# Altium PCB PCB2.PcbDoc (part 1 of 2)
Units mm, origin at the board's own origin, x right, y up, seen from the top; angles counter-clockwise.
Board outline 105.63 x 88.15 mm, 2 copper layers (Top Layer, Bottom Layer); 104 components, 90 nets, 384 pads, 160 vias.
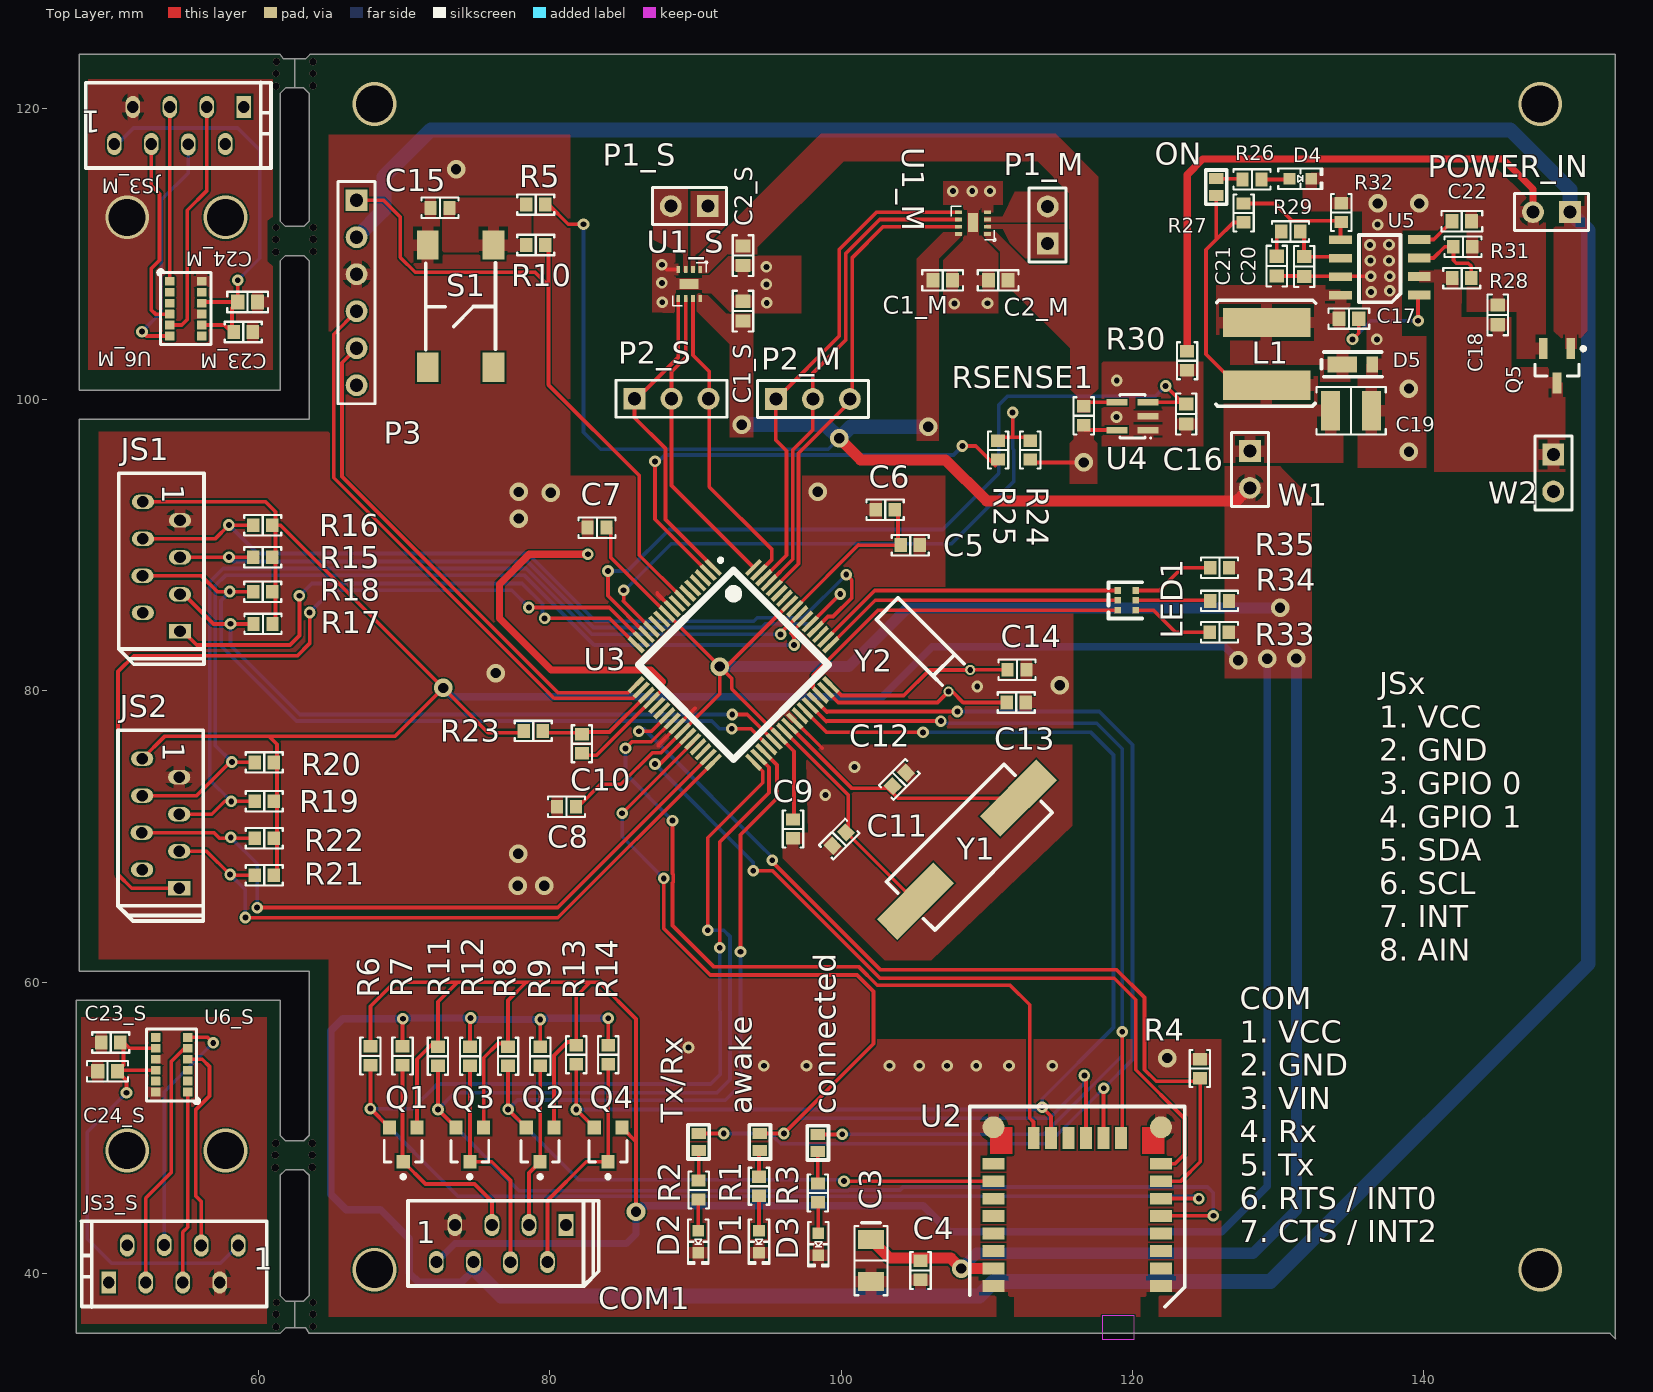
[diagram p0: Top Layer view]
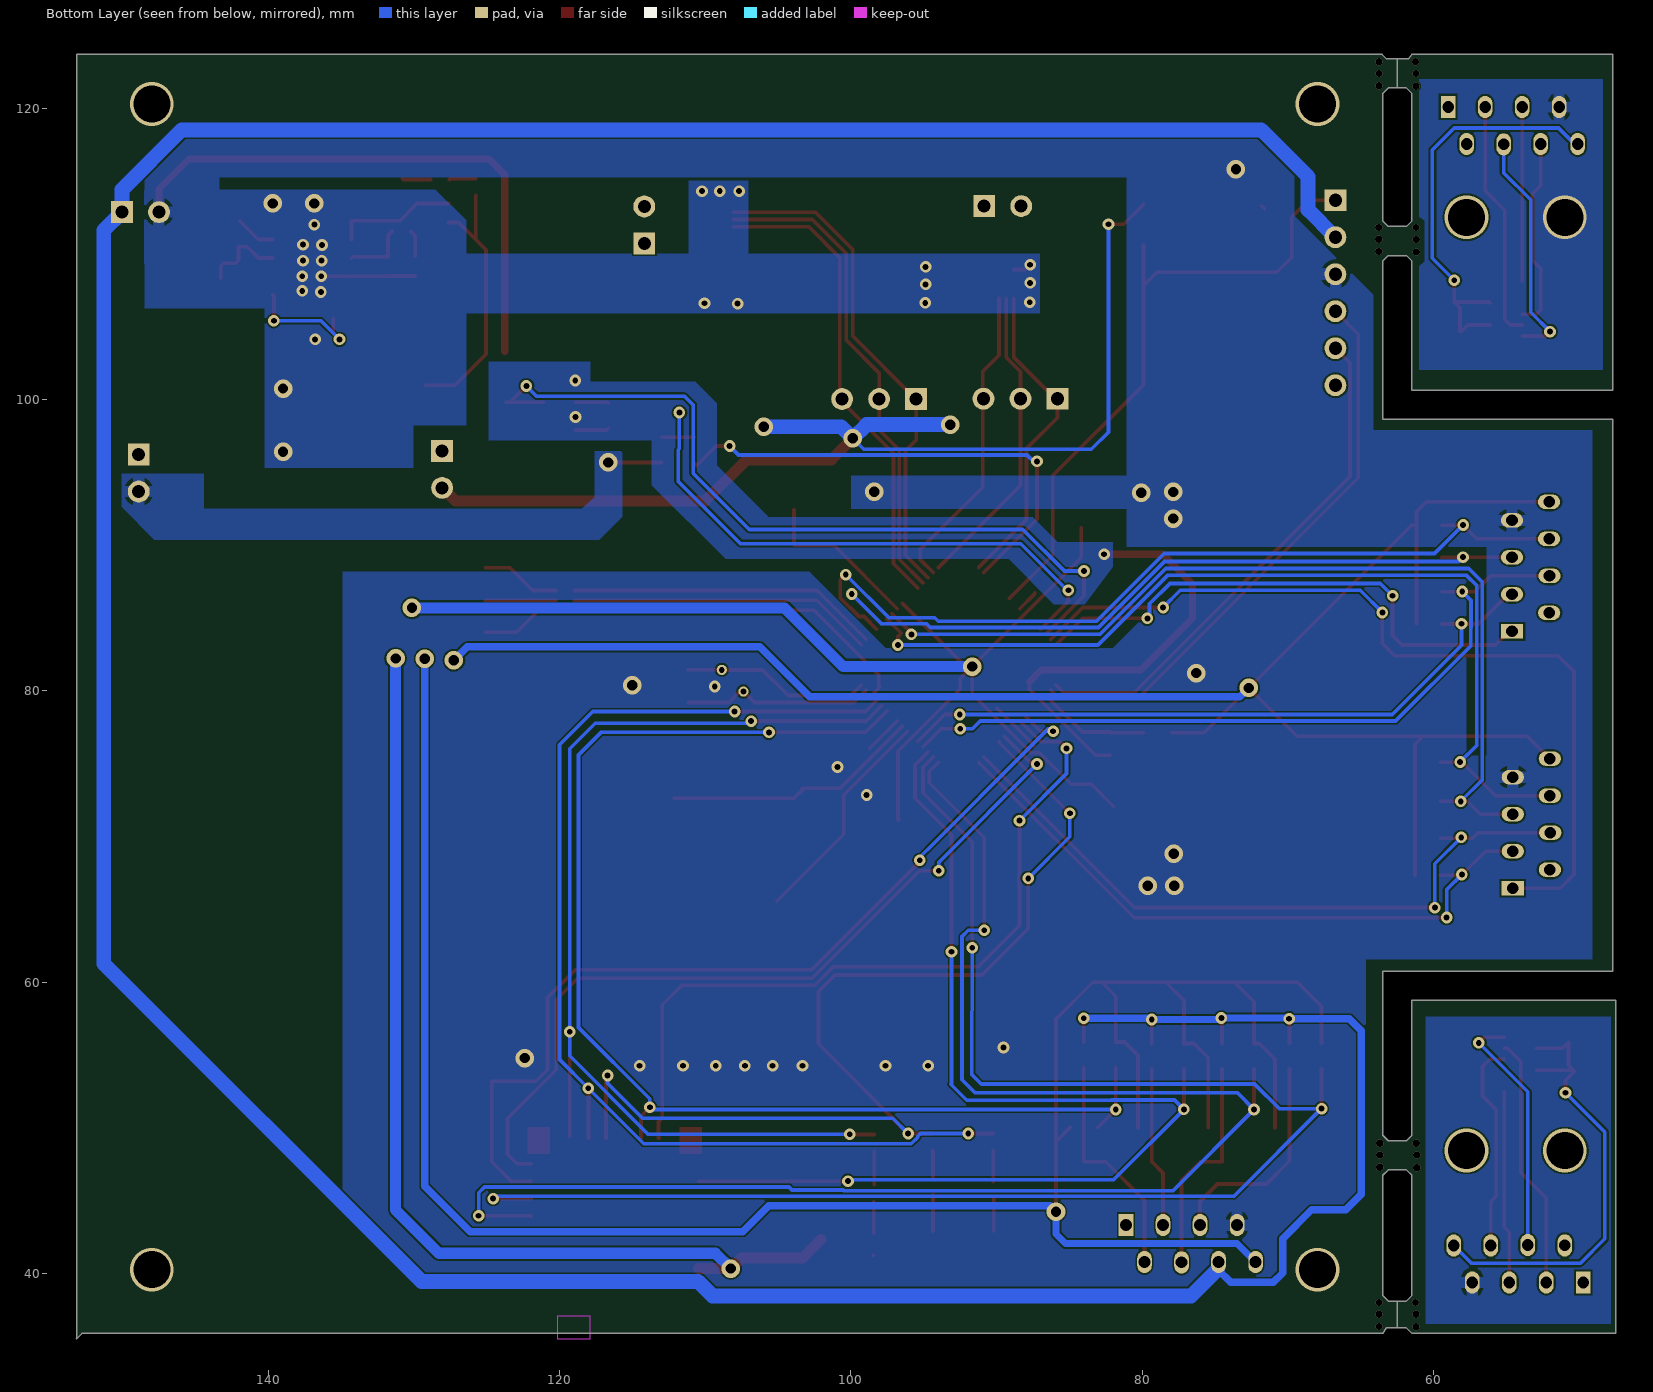
[diagram p1: Bottom Layer view, seen from below]
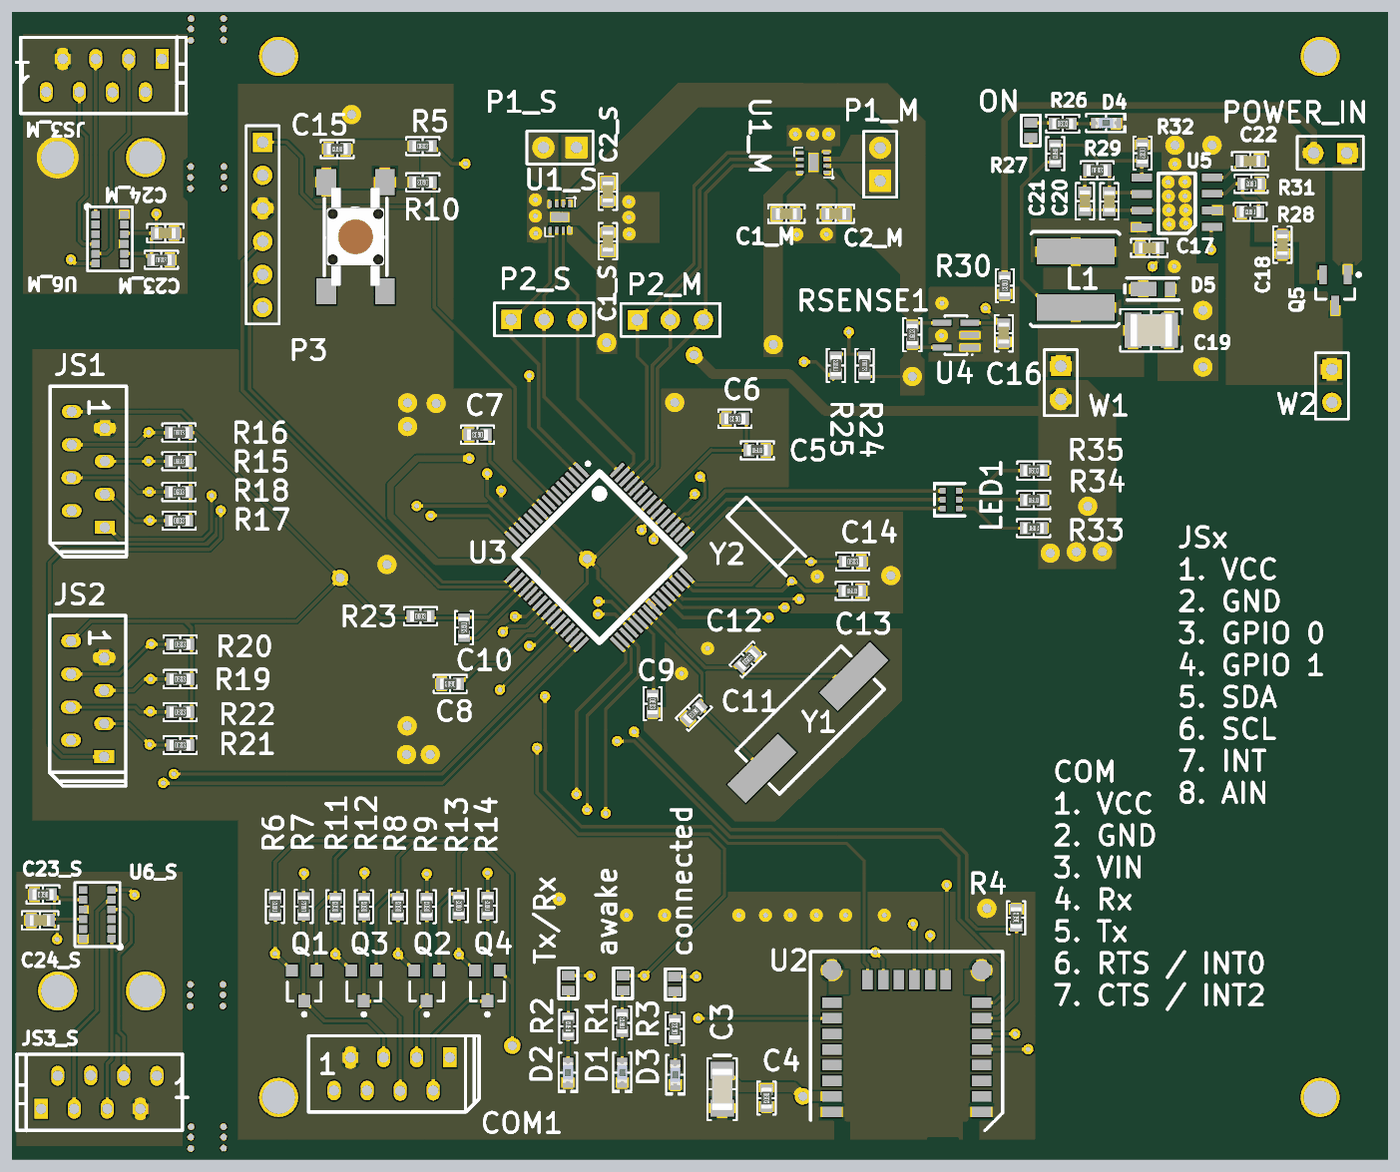
[diagram p3: 3D render of the assembled board from above, using the file's embedded part models]

## Layer stack, top to bottom
Top Solder: solder mask 0.0102, Solder Resist, Dk 3.5
Top Layer: signal copper 0.0356
Dielectric 1: dielectric 0.32, FR-4, Dk 4.8
Bottom Layer: signal copper 0.0356
Bottom Solder: solder mask 0.0102, Solder Resist, Dk 3.5

## Board outline
47.699,98.625 63.5,98.625 63.5,109.5 63.125,109.875 61.875,109.875 61.5,109.5 61.5,100.625 47.699,100.625 47.699,123.675 61.5,123.675 61.75,123.375 62.5,123.375 62.5,121.375 61.875,121.375 61.5,121 61.5,112.25 61.875,111.875 63.125,111.875 63.5,112.25 63.5,121 63.125,121.375 62.5,121.375 62.5,123.375 63.25,123.375 63.55,123.675 153.125,123.675 153.125,35.55 153.15,35.525 152.775,35.9 63.5,35.9 63.25,36.275 62.5,36.275 62.5,38.125 63.125,38.125 63.499,38.499 63.5,46.75 63.125,47.125 61.875,47.125 61.5,46.75 61.5,38.499 61.875,38.124 62.5,38.125 62.5,36.275 61.875,36.275 61.5,35.9 47.525,35.9 47.525,58.75 61.5,58.75 61.5,49.5 61.875,49.125 63.125,49.125 63.5,49.5 63.5,60.75 47.699,60.75

## Design rules (kind name [scope] priority, off if disabled: settings)
Clearance Clearance_1 [All] p1: gap=0.127
Clearance clearance_Vbat_sense [All] p2: gap=0.127
ComponentClearance [All] p1: gap=0 collisioncheckmode=3 verticalgap=0.254 showdistances=FALSE
MinimumSolderMaskSliver [All] p1: minsoldermaskwidth=0.021
PlaneConnect [IsVia] p1: planeconnectstyle=Direct reliefexpansion=0.508 reliefentries=4 reliefconductorwidth=0.254 reliefairgap=0.254
PlaneConnect PlaneConnect_1 [All] p2: planeconnectstyle=Relief reliefexpansion=0.508 reliefentries=4 reliefconductorwidth=0.8 reliefairgap=0.254
PolygonConnect PolygonConnect_1 [All vs IsVia  or IsNamedPolygon('NETP1_S_2_L01_P078')  or IsNamedPolygon('NETP1_S_1_L01_P080')  or IsNamedPolygon('NETP1_M_1_L01_P094') or IsNamedPolygon('NETP1_M_2_L01_P084') or IsNamedPolygon('VM_L01_P028') Or  IsNamedPolygon('VM_L01_P026') Or  IsNamedPolygon('VM_L01_P024') or IsNamedPolygon('VCC_L01_P046') or IsNamedPolygon('VCC_L01_P042')] p1: connectstyle=Direct reliefconductorwidth=0.254 reliefentries=4 polygonreliefangle="90 Angle" airgapwidth=0.254
PolygonConnect [All] p2: connectstyle=Relief reliefconductorwidth=0.8 reliefentries=4 polygonreliefangle="90 Angle" airgapwidth=0.254
RoutingVias [All] p1: holewidth=0.35 width=0.7 viastyle="Through Hole" minholewidth=0.3 minwidth=0.7 maxholewidth=0.711 maxwidth=1.27
SilkToSilkClearance [All] p1: silktosilkclearance=0.1
SilkToSolderMaskClearance [IsPad] p1: minsilkscreentomaskgap=0.098 clearancetoexposedcopper=TRUE
SolderMaskExpansion [All] p1: expansion=0.102
Width [All] p1: maxlimit=1.016 minlimit=0.254 preferedwidth=0.254
25 further rules are at their usual default settings.

## Classes and differential pairs
component class COMBLE: awake C3 C4 connected D2 D3 D4 R1 R2 R3 R4 Tx/Rx U2
component class CTRL: C5 C6 C7 C8 C9 C10 C11 C12 C13 C14 C19 COM1 JS1 JS2 P3 Q1 Q2 Q3 Q4 R5 R6 R7 R8 R9 R10 R11 R12 R13 R14 R15 R16 R17 R18 R19 R20 R21 R26 S S1 U3 Y1 Y2
component class S: C1_S C2_S P1_S P2_S U1_S
component class currentSensor: C22 RSENSE1 U4
component class RGBLED: LED1 R28 R29 R31
component class M: C1_M C2_M P1_M P2_M U1_M
component class powerSupply: C19 C20 C21 C22 D4 D5 L1 ON POWER_IN Q5 R25 R26 R27 R28 R29 R30 R31 R32 U5 W1 W2
component class S: C23_S C24_S JS3_S U6_S
component class M: C23_M C24_M JS3_M U6_M
channel class actuatorDriver: actuatorDriver S
channel class Sensor: S Sensor

## Components (designator, comment, footprint, x,y, rotation, side; value= is the part's Value field where it differs from the comment)
awake "Circuit Breaker" "JUMPER PAD" 94.424,49.044 r90 top (schematic designator CB3)
C1_M "100n" "CAP 0603/1608" 106.976,108.167 r0 top (schematic designator C1)
C1_S "100n" "CAP 0603/1608" 93.267,106.065 r90 top (schematic designator C1)
C2_M "100n" "CAP 0603/1608" 110.78,108.167 r0 top (schematic designator C2)
C2_S "100n" "CAP 0603/1608" 93.267,109.869 r90 top (schematic designator C2)
C3 "4.7u" "CAP POL 1206/3216 - 1.2MM" 102.05,40.9 r270 top
C4 "100n" "RES 0603/1608" 105.45,40.225 r270 top
C5 "100n" "RES 0603/1608" 104.75,90 r0 top
C6 "100n" "RES 0603/1608" 103.025,92.425 r180 top
C7 "100n" "RES 0603/1608" 83.25,91.2 r180 top
C8 "100n" "RES 0603/1608" 81.156,72.05 r180 top
C9 "100n" "RES 0603/1608" 96.7,70.525 r270 top
C10 "100n" "RES 0603/1608" 82.21,76.375 r270 top
C11 "22pf" "RES 0603/1608" 99.875,69.825 r225 top
C12 "22pf" "RES 0603/1608" 104,73.925 r45 top
C13 "27pf" "RES 0603/1608" 112.025,79.2 r0 top
C14 "27pf" "RES 0603/1608" 112.075,81.45 r0 top
C15 "100n" "RES 0603/1608" 72.475,113.15 r180 top
C16 "100n" "CAP 0603/1608" 123.675,99 r270 top
C17 "100n" "CAP 0603/1608" 134.85,105.55 r180 top
C18 "22u" "CAP 0603/1608" 145.075,105.8 r90 top
C19 "47u" "CAP 1210/3225 - 2.5MM" 135,99.225 r0 top
C20 "75pf" "CAP 0603/1608" 131.775,109.125 r270 top
C21 "3.9nf" "CAP 0603/1608" 129.9,109.15 r270 top
C22 "8.2nf" "CAP 0603/1608" 142.6,112.225 r0 top
C23_M "100n" "RES 0603/1608" 58.969,104.631 r0 top (schematic designator C23)
C23_S "100n" "RES 0603/1608" 49.881,55.867 r180 top (schematic designator C23)
C24_M "4.7u" "CAP 0603/1608" 59.269,106.686 r180 top (schematic designator C24)
C24_S "4.7u" "CAP 0603/1608" 49.656,53.888 r0 top (schematic designator C24)
COM1 "Header 8" 7-215460-8 76.675,42.075 r0 top
connected "Circuit Breaker" "JUMPER PAD" 98.407,48.971 r90 top (schematic designator CB1)
D1 "awake" "LED 0603/1608 BLUE" 94.364,42.186 r270 top
D2 "Tx/Rx" "LED 0603/1608 BLUE" 90.199,42.186 r270 top
D3 "connected" "LED 0603/1608 BLUE" 98.442,42.016 r270 top
D4 "LED2" "LED 0603/1608 BLUE" 131.525,115.15 r0 top
D5 "550mV" microSMA 135.675,102.4 r0 top
JS1 "SENSOR_1" 7-215460-8 53.354,88.526 r270 top
JS2 "SENSOR_2" 7-215460-8 53.303,70.901 r270 top
JS3_M "Header 8" 7-215464-8 54.569,118.806 r0 top (schematic designator JS3)
JS3_S "Header 8" 7-215464-8 54.181,40.667 r180 top (schematic designator JS3)
L1 "15UH" SRN6045-3R3Y 129.2,103.125 r270 top
LED1 "LED_Red_Blue_Green" SMLP36 119.599,86.211 r90 top
ON "Circuit Breaker" "JUMPER PAD" 125.75,114.575 r270 top (schematic designator CB4)
P1_M "Actuator" HDR1X2 114.18,110.707 r90 top (schematic designator P1)
P1_S "Actuator" HDR1X2 90.854,113.268 r180 top (schematic designator P1)
P2_M "Header 3H" HDR1X3 95.525,100.025 r0 top (schematic designator P2)
P2_S "Header 3H" HDR1X3 85.825,100.05 r0 top (schematic designator P2)
P3 "Header 6" HDR1X6 66.75,113.675 r270 top
POWER_IN "BAT" HDR1X2 150.024,112.854 r180 top (schematic designator P4)
Q1 "MOSFET-N" SOT-23 69.947,48.854 r180 top
Q2 "MOSFET-N" SOT-23 79.345,48.854 r180 top
Q3 "MOSFET-N" SOT-23 74.519,48.854 r180 top
Q4 "MOSFET-N" SOT-23 84.008,48.854 r180 top
Q5 "FDN5618P" SOT-23_M 149.135,102.313 r270 top
R1 "220" "RES 0603/1608" 94.364,45.996 r90 top
R2 "220" "RES 0603/1608" 90.225,45.742 r90 top
R3 "22" "RES 0603/1608" 98.407,45.542 r90 top
R4 "10k" "RES 0603/1608" 124.625,54.075 r90 top
R5 "10k" "RES 0603/1608" 79.05,113.375 r0 top
R6 "10k" "RES 0603/1608" 67.698,54.95 r90 top
R7 "10k" "RES 0603/1608" 69.902,54.95 r90 top
R8 "10k" "RES 0603/1608" 77.147,54.925 r90 top
R9 "10k" "RES 0603/1608" 79.352,54.925 r90 top
R10 "330" "RES 0603/1608" 79.05,110.6 r180 top
R11 "10k" "RES 0603/1608" 72.331,54.925 r90 top
R12 "10k" "RES 0603/1608" 74.536,54.925 r90 top
R13 "10k" "RES 0603/1608" 81.819,55.025 r90 top
R14 "10k" "RES 0603/1608" 84.024,55.025 r90 top
R15 "47k" "RES 0603/1608" 60.314,89.165 r0 top
R16 "47k" "RES 0603/1608" 60.314,91.369 r0 top
R17 "4,7k" "RES 0603/1608" 60.325,84.593 r0 top
R18 "4,7k" "RES 0603/1608" 60.314,86.797 r0 top
R19 "47k" "RES 0603/1608" 60.415,72.425 r0 top
R20 "47k" "RES 0603/1608" 60.415,75.092 r0 top
R21 "4,7k" "RES 0603/1608" 60.415,67.345 r0 top
R22 "4,7k" "RES 0603/1608" 60.415,69.885 r0 top
R23 "0" "RES 0603/1608" 78.875,77.25 r0 top
R24 "7,5K" "RES 0603/1608" 112.979,96.525 r270 top
R25 "2,4k" "RES 0603/1608" 110.775,96.525 r90 top
R26 "22" "RES 0603/1608" 128.2,115.1 r0 top
R27 "10.2k" "RES 0603/1608" 127.625,112.8 r270 top
R28 "10k" "RES 0603/1608" 142.6,108.325 r180 top
R29 "20.5k" "RES 0603/1608" 130.85,111.525 r0 top
R30 "0" "RES 0603/1608" 123.75,102.65 r270 top
R31 "1MEG" "RES 0603/1608" 142.675,110.475 r180 top
R32 "3.7K" "RES 0603/1608" 134.325,112.825 r270 top
R33 "47" "RES 0603/1608" 125.963,84.021 r0 top
R34 "22" "RES 0603/1608" 125.975,86.175 r0 top
R35 "220" "RES 0603/1608" 125.975,88.45 r0 top
RSENSE1 "0.2" "RES 0603/1608" 116.65,98.875 r90 top
S1 "SW-PB" Button 73.885,106.409 r270 top
Tx/Rx "Circuit Breaker" "JUMPER PAD" 90.225,49.044 r90 top (schematic designator CB2)
U1_M "DRV8838" S-PWSON-N8 109.056,112.104 r180 top (schematic designator U1)
U1_S "DRV8838" S-PWSON-N8 89.584,107.922 r270 top (schematic designator U1)
U2 "RN4020" RN4020 116.212,40.304 r180 top
U3 "PIC32MX340F512H-80I/PT_1" TSQFP50P1200X1200X120-64N 92.615,81.789 r315 top
U4 "TS1100" SOT23-5 120,98.85 r90 top
U5 "TPS54231D" SOIC8 136.975,109.075 r90 top
U6_M "VL6180x" LGA12 55.019,106.231 r0 top (schematic designator U6)
U6_S "VL6180x" LGA12 54.056,54.342 r180 top (schematic designator U6)
W1 "Shunt, Jumper" HDR1X2 128.053,96.471 r270 top
W2 "Shunt, Jumper" HDR1X2 148.881,96.217 r270 top
Y1 "8MHz" XTAL_HC-49/SM 108.806,69.275 r225 top
Y2 "32.768Khz" XTAL_AB26T 108.118,80.696 r45 top

## Footprints (in the part's own frame and the unit in brackets; to place one, negate y for a bottom-side part, rotate by r counter-clockwise, add the part's x,y. Pads: shape width x height; smd on the part's side, far side on the other; paste and mask are expansions set on the pad)
7-215460-8 [mm] "Connecteur carte-à-carte, Entrée latérale, 1.27 mm, 8 Contact(s), Embase, Série Micro-MaTch"
  oval 1x1.524 hole 0.8: 1(-4.445,-1.27) 2(-3.175,1.27) 3(-1.905,-1.27) 4(-0.635,1.27) 5(0.635,-1.3) 6(1.905,1.27) 7(3.175,-1.275)
  rect 1x1.524 hole 0.8: 8(4.445,1.27)
  silkscreen extent -6.4,-2.93 6.7,2.93
7-215464-8 [mm] "Connecteur carte-à-carte, 1.27 mm, 8 Contact(s), Mâle, Série Micro-MaTch, Traversant, 2 Rangée(s)"
  oval 1x1.524 hole 0.8: 1(-4.445,-1.27) 2(-3.175,1.27) 3(-1.905,-1.27) 4(-0.635,1.27) 5(0.635,-1.3) 6(1.905,1.27) 7(3.175,-1.275)
  rect 1x1.524 hole 0.8: 8(4.445,1.27)
  silkscreen extent -6.4,-2.93 6.33,2.95
Button [mm]
  rect 2x1.5 smd: 1(-4.2,2.25) 2(-4.2,-2.25) 3(4.2,-2.25) 4(4.2,2.25)
  silkscreen extent -2.95,-2.4 2.98,2.4, body extent -3.75,-2.25 3.75,2.25, height 3.8
"CAP 0603/1608" [mm] "Chip Capacitor, 2-Leads, Body 1.60x0.80mm, IPC Medium Density"
  rect 0.9x1 smd: 1(-0.675,0) 2(0.675,0)
  silkscreen extent -1.4,-0.7 1.4,0.7, body extent -0.8,-0.41 0.8,0.41, height 0.82
"CAP 1210/3225 - 2.5MM" [mm] "Chip Capacitor, 2-Leads, Body 3.20x2.50mm, IPC Medium Density"
  rect 1.3x2.7 smd: 1(-1.4,0) 2(1.4,0)
  silkscreen extent -2.37,-1.63 2.37,1.63, body extent -1.6,-1.25 1.6,1.25, height 2.5
"CAP POL 1206/3216 - 1.2MM" [mm] "Chip Capacitor, 2-Leads, Body 3.25x1.60mm, IPC Medium Density"
  rect 1.3x1.8 smd: 1(-1.45,0) 2(1.45,0)
  silkscreen extent -2.6,-1.12 2.37,1.12, body extent -1.6,-0.8 1.6,0.8, height 1.2
HDR1X2 [mm] "Connector; Header; 2 Position"
  rect 1.5x1.5 hole 0.9: 1(0,0)
  round 1.5 hole 0.9: 2(2.54,0)
  silkscreen extent -1.27,-1.27 3.81,1.27
HDR1X3 [mm] "Connector; Header; 3 Position"
  rect 1.5x1.5 hole 0.9: 1(0,0)
  round 1.5 hole 0.9: 2(2.54,0) 3(5.08,0)
  silkscreen extent -1.27,-1.27 6.35,1.27
HDR1X6 [mm] "Connector; Header; 6 Position"
  rect 1.5x1.5 hole 0.9: 1(0,0)
  round 1.5 hole 0.9: 2(2.54,0) 3(5.08,0) 4(7.62,0) 5(10.16,0) 6(12.7,0)
  silkscreen extent -1.27,-1.27 13.97,1.27
"JUMPER PAD" [mm]
  rect 0.75x1 smd: 1(0.575,0) 2(-0.575,0)
  silkscreen extent -1.18,-0.72 1.17,0.72
"LED 0603/1608 BLUE" [mm] "Chip Diode, 2-Leads, Body 1.60x0.80mm, IPC Medium Density"
  rect 0.8x0.8 smd: 1(-0.75,0) 2(0.75,0)
  silkscreen extent -1.52,-0.7 1.52,0.7, body extent -0.8,-0.4 0.8,0.4, height 0.53
LGA12 [mm] "optical IR sensor"
  rrect5% 0.65x0.6 smd: 1(-1.1,1.875) 2(-1.1,1.125) 3(-1.1,0.375) 4(-1.1,-0.375) 5(-1.1,-1.125) 6(-1.1,-1.875) 7(1.1,-1.875) 8(1.1,-1.125) 9(1.1,-0.375) 10(1.1,0.375) 11(1.1,1.125) 12(1.1,1.875)
  silkscreen extent -1.92,-2.45 1.73,2.68, body extent -1.43,-2.2 1.41,2.18, height 1
microSMA [mm]
  rect 2x1.1 smd: 1(-1.275,0)
  rect 0.8x1.1 smd: 2(0.775,0)
  silkscreen extent -2.7,-0.85 1.45,0.85
"RES 0603/1608" [mm] "Chip Resistor, 2-Leads, Body 1.60x0.80mm, IPC Medium Density"
  rect 0.85x0.95 smd: 1(-0.65,0) 2(0.65,0)
  silkscreen extent -1.27,-0.7 1.27,0.7, body extent -0.8,-0.4 0.8,0.4, height 0.45
RN4020 [mm] "Bluetooth® Low Energy Module"
  rrect100% 1x2 on Keep-Out: 0(-4.95,3) 0(4.95,3)
  rect 1.5x0.8 smd: 1(-5.75,1.15) 2(-5.75,-0.05) 3(-5.75,-1.25) 4(-5.75,-2.45) 5(-5.75,-3.65) 6(-5.75,-4.85) 7(-5.75,-6.05) 8(-5.75,-7.25) 17(5.75,-7.25) 18(5.75,-6.05) 19(5.75,-4.85) 20(5.75,-3.65) 21(5.75,-2.45) 22(5.75,-1.25) 23(5.75,-0.05) 24(5.75,1.15)
  round 1.5 smd: 9(-5.75,-9.75) 16(5.75,-9.75)
  rect 0.8x1.5 smd: 10(-3,-9) 11(-1.8,-9) 12(-0.6,-9) 13(0.6,-9) 14(1.8,-9) 15(3,-9)
  Top Layer region: -6,-9.75 -4.45,-9.75 -4.45,-7.9 -6,-7.9
  Top Layer region: 6,-7.9 4.45,-7.9 4.45,-9.75 6,-9.75
  Keep-Out Layer region: -3.9,3.2 -1.7,3.2 -1.7,4.8 -3.9,4.8
  silkscreen extent -7.37,-11.17 7.37,2.58, body extent -5.75,-9.75 5.75,9.75, height 2.3
S-PWSON-N8 [mm]
  rrect1% 0.5x0.25 smd: 1(-1,0.75) 2(-1,0.25) 3(-1,-0.25) 4(-1,-0.75) 5(1,-0.75) 6(1,-0.25) 7(1,0.25) 8(1,0.75)
  rect 0.7x1.3 smd: 4(0,-0.025)
  silkscreen extent -1.57,-1.15 1.48,1.25, body extent -1.01,-1 1.01,0.95, height 0.8
SMLP36 [mm] "PICOLED - RGB"
  rect 0.45x0.45 smd: 1(-0.675,-0.625) 2(0,-0.625) 3(0.675,-0.625) 4(0.675,0.625) 5(0,0.625) 6(-0.675,0.625)
  silkscreen extent -1.25,-1.07 1.25,1.25, body extent -0.91,-0.75 0.84,0.74, height 0.2
SOIC8 [mm]
  rect 0.6x1.55 smd: 1(-1.905,-2.7) 2(-0.635,-2.7) 3(0.635,-2.7) 4(1.905,-2.7) 5(1.88,2.7) 6(0.61,2.7) 7(-0.66,2.7) 8(-1.93,2.7)
  silkscreen extent -2.4,-1.41 2.21,1.43
SOT23-5 [mm] "SOT-23/SC-74A; 5 Leads; Body 3.1 x 3 mm, inc. leads (LxW max)"
  rect 0.45x1.45 smd: 1(-0.95,-1.075) 2(0,-1.075) 3(0.95,-1.075) 4(0.95,1.075) 5(-0.95,1.075)
  silkscreen extent -1.55,-1.3 1.5,0.85, body extent -1.6,-0.88 1.6,0.88, height 1.3
SOT-23 [mm] "SOT-23; 3 Leads; Body 3.0 x 2.5 mm, inc. leads (LxW max), Alternate Lead Configuration"
  rect 0.9x0.95 smd: 1(0,1.175) 2(-0.95,-1.175) 3(0.95,-1.175)
  silkscreen extent -1.3,-0.3 1.3,2.32
SOT-23_M [mm] "SOT23, 3-Leads, Body 2.9x1.3mm, Pitch 0.95mm, Lead Span 2.5mm, IPC Low Density"
  rect 1.45x0.6 smd: 1(-1.175,0.95) 2(-1.175,-0.95) 3(1.175,0)
  silkscreen extent -1.3,-1.5 0.7,1.93, body extent -0.7,-1.5 0.7,1.5, height 1.1
SRN6045-3R3Y [mm] "INDUCTOR, SHIELDED, 3.3UH, 5A, SMD"
  rect 2x6 smd: 1(-2.15,0) 2(2.15,0)
  silkscreen extent -3.67,-3.47 3.6,3.37
TSQFP50P1200X1200X120-64N [mm] "TSQFP, 64-Leads, Body 10.00x10.00mm, Pitch 0.50mm, IPC Medium Density"
  rect 1.4x0.3 smd: 1(-5.7,3.75) 2(-5.7,3.25) 3(-5.7,2.75) 4(-5.7,2.25) 5(-5.7,1.75) 6(-5.7,1.25) 7(-5.7,0.75) 8(-5.7,0.25) 9(-5.7,-0.25) 10(-5.7,-0.75) 11(-5.7,-1.25) 12(-5.7,-1.75) 13(-5.7,-2.25) 14(-5.7,-2.75) 15(-5.7,-3.25) 16(-5.7,-3.75) 33(5.7,-3.75) 34(5.7,-3.25) 35(5.7,-2.75) 36(5.7,-2.25) 37(5.7,-1.75) 38(5.7,-1.25) 39(5.7,-0.75) 40(5.7,-0.25) 41(5.7,0.25) 42(5.7,0.75) 43(5.7,1.25) 44(5.7,1.75) 45(5.7,2.25) 46(5.7,2.75) 47(5.7,3.25) 48(5.7,3.75)
  rect 0.3x1.4 smd: 17(-3.75,-5.7) 18(-3.25,-5.7) 19(-2.75,-5.7) 20(-2.25,-5.7) 21(-1.75,-5.7) 22(-1.25,-5.7) 23(-0.75,-5.7) 24(-0.25,-5.7) 25(0.25,-5.7) 26(0.75,-5.7) 27(1.25,-5.7) 28(1.75,-5.7) 29(2.25,-5.7) 30(2.75,-5.7) 31(3.25,-5.7) 32(3.75,-5.7) 49(3.75,5.7) 50(3.25,5.7) 51(2.75,5.7) 52(2.25,5.7) 53(1.75,5.7) 54(1.25,5.7) 55(0.75,5.7) 56(0.25,5.7) 57(-0.25,5.7) 58(-0.75,5.7) 59(-1.25,5.7) 60(-1.75,5.7) 61(-2.25,5.7) 62(-2.75,5.7) 63(-3.25,5.7) 64(-3.75,5.7)
  silkscreen extent -5.82,-4.6 4.6,4.6, body extent -5,-5 5,5, height 1.2
XTAL_AB26T [mm] "ABRACON  AB26T-32.768KHZ.  CRYSTAL, 32.768KHZ, 12.5PF, CYLINDER"
  round 0.7 hole 0.4: 1(-1.05,0) 2(1.05,0)
  silkscreen extent -1.05,0.6 1.05,7
XTAL_HC-49/SM [mm] "MULTICOMP   HC49SM-8-30-50-60-16-ATF  Cristal, 8 MHz, CMS, 11.4mm x 4.65mm, 50 ppm, 16 pF, 30 ppm, Série HC49SM"
  rect 5.5x2 smd: 1(-4.75,0) 2(5.25,0)
  silkscreen extent -5.7,-2.35 5.7,2.35

## Part data
C1_M C1_S C2_M C2_S C4 C5 C6 C7 C8 C9 C10 C15 C16 C23_M C23_S: library part Cap, "MULTICOMP  MCSH21B104K100CT  Condensateur céramique multicouche CMS, 0805 [2012 Metric], 0.1 µF, 10 V, ± 10%, X7R, Série MCSH"
C3: library part "Cap Pol2", "Condensateur tantale CMS, 4.7 µF, 10 V, Série T491, ± 10%"
C11 C12: library part Cap, "Condensateur céramique multicouche CMS, 0805 [2012 Metric], 22 pF, 50 V, ± 5%, C0G / NP0"
C13 C14: library part Cap, "Condensateur céramique multicouche CMS, 0805 [2012 Metric], 27 pF, 50 V, ± 5%, C0G / NP0"
C17: library part Cap, "AVX  08053C104KAT2A  Condensateur céramique multicouche CMS, 0805 [2012 Metric], 0.1 µF, 25 V, ± 10%, X7R"
C18 C20 C21 C22: library part Cap
C19: library part Cap, "Condensateur céramique multicouche CMS, 1210 [3225 Metric], 47 µF, 16 V, ± 20%, X5R, Série GRM"
C24_M C24_S: library part Cap, "WALSIN  0603X475K6R3CT  Condensateur céramique multicouche CMS, 0603 [1608 Metric], 4.7 µF, 6.3 V, ± 10%, X5R"
COM1 JS3_M JS3_S: "AMP - TE CONNECTIVITY  7-215460-8  Connecteur carte-à-carte, Entrée latérale, 1.27 mm, 8 Contact(s), Embase, Série Micro-MaTch"
D1 D2: library part LED2, "LED, Ambre, CMS, 0.8mm x 1.1mm, 5 mA, 1.95 V, 590 nm"
D3: library part LED2, "LED, Bleu, CMS, 0.8mm x 1.6mm, 5 mA, 2.9 V, 470 nm"
D4: "LED, Bleu, CMS, 0.8mm x 1.6mm, 5 mA, 2.9 V, 470 nm"
D5: library part schottky, "TAIWAN SEMICONDUCTOR  SS14M  Redresseur Schottky, 40 V, 1 A, Une, MicroSMA, 2 Broche(s), 550 mV"
JS1 JS2: library part "Header 8", "AMP - TE CONNECTIVITY  7-215460-8  Connecteur carte-à-carte, Entrée latérale, 1.27 mm, 8 Contact(s), Embase, Série Micro-MaTch"
L1: library part Inductor, "BOURNS  SRN6045-150M  Inductance de puissance CMS, 15 µH, 1.9 A, 2.3 A, Blindé, 0.0958 ohm"
LED1: "PICOLED, Rouge, Vert, Bleu, CMS, Rectangulaire, R 5mA, G 5mA, B 5mA"
P1_M P1_S POWER_IN: library part "Header 2", "Header, 2-Pin"
P2_M P2_S: "WURTH ELEKTRONIK  61300611121  Connecteur carte-à-carte, Vertical, 2.54 mm, 6 Contact(s), Embase, Série WR-PHD, Traversant"
P3: "Header, 6-Pin"
Q1 Q2 Q3 Q4: "Transistor MOSFET, Canal N, 200 mA, 60 V, 2.7 ohm, 10 V, 1.2 V"
Q5: library part MOSFET-P, "Transistor MOSFET, Canal P, -1.25 A, -60 V, 170 mohm, -10 V, 20 V"
R1 R2 R35: library part Res2, "YAGEO (PHYCOMP)  RC0805FR-07220RL  Résistance à puce CMS, Couche épaisse, 220 ohm, 150 V, 0805 [2012 Metric], 125 mW, ± 1%, Série RC"
R3 R34: library part Res2, "YAGEO (PHYCOMP)  RC0805FR-0722RL  Résistance à puce CMS, Couche épaisse, 22 ohm, 150 V, 0805 [2012 Metric], 125 mW, ± 1%, Série RC"
R4 R5 R6 R7 R8 R9 R11 R12 R13 R14: library part Res2, "Résistance à puce CMS, Couche épaisse, 10 kohm, 150 V, 0805"
R10: library part Res2, "ARCOL/OHMITE  ACPP0805330RBE  Résistance à puce CMS, Passivée de précision, 330 ohm, 100 V, 0805 [2012 Metric], 100 mW, ± 0.1%"
R15 R16 R19 R20: library part Res2, "Résistance à puce CMS, Couche épaisse, 47 kohm, 150 V, 0805 [2012 Metric], 125 mW, ± 1%, Série RC"
R17 R18 R21 R22: library part Res2, "Résistance à puce CMS, Couche épaisse, 4.7 kohm, 150 V, 0805 [2012 Metric], 125 mW, ± 5%, Série RC"
R23 R30: library part Res2, "MULTICOMP  MC0805S8F0000T5E  Résistance à puce CMS, Couche épaisse, 0 ohm, 150 V, 0805 [2012 Metric], 125 mW, ± 1%, Série MC"
R24: library part Res2, "PANASONIC ELECTRONIC COMPONENTS  ERJ6GEYJ752V  Résistance à puce CMS, Couche épaisse, 7.5 kohm, 150 V, 0805 [2012 Metric], 125 mW, ± 5%"
R25: library part Res2, "YAGEO (PHYCOMP)  RC0805FR-0710KL  Résistance à puce CMS, Couche épaisse, 10 kohm, 150 V, 0805 [2012 Metric], 125 mW, ± 1%, Série RC"
R26 R27 R28 R29 R31 R32: library part Res2
R33: library part Res2, "YAGEO (PHYCOMP)  RC0805FR-0747RL  Résistance à puce CMS, Couche épaisse, 47 ohm, 150 V, 0805 [2012 Metric], 125 mW, ± 1%, Série RC"
RSENSE1: library part Res2, "SUSUMU  RL1220S-R20-F  Résistance CMS de détection de courant, 0.2 ohm, 250 mW, 0805 [2012 Metric], ± 1%, Série RL"
S1: "Commutateur tactile, Non lumineux, 12 V, 50 mA, 100 gf, CMS, Série DTSZML-6"
U1_M U1_S: "Moteur Driver [H - bridge]"
U2: "MICROCHIP  RN4020-V/RM  Module Bluetooth® Low Energy v4.1, 2.4GHz à 2.48GHz, 1 MBPS"
U3: "High Performance 80 MHz MIPS-Based 32-Bit Flash Microcontroller, 512KB Program Memory, 64-pin TQFP"
U4: "SILICON LABS  TS1100-25EG5T  Amplificateur de mesure de courant, Précision, 1 amplificateur, SOT-23, 5 Broche(s), -40 °C, 105 °C"
U5: "TEXAS INSTRUMENTS  TPS54231D  Régulateur DC/DC à découpage Buck (Step Down), Ajustable, 3.5V-28Vin, 800mV-25Vout, 2Aout, SOIC-8"
U6_M U6_S: "STMICROELECTRONICS  VL6180XV0NR/1  Capteur de proximité, Numérique, 100 mm, LGA, 12 Broche(s), 2.6 V, 3 V"
W1 W2: library part Jumper, "Jumper Socket, Pin Headers, 2 Voies, 1.27 mm"
Y1: library part XTAL, "MULTICOMP  HC49SM-8-30-50-60-16-ATF  Cristal, 8 MHz, CMS, 11.4mm x 4.65mm, 50 ppm, 16 pF, 30 ppm, Série HC49SM"
Y2: library part XTAL, "ABRACON  AB26T-32.768KHZ  Cristal, 32.768 kHz, Cylindrique radial, diamètre 6.2mm x 2.1mm, 12.5 pF, 20 ppm, Série AB26T"

## Via types
v1: diameter 0.8, hole 0.4, Top Layer to Bottom Layer, 101 vias
v2: diameter 1.27, hole 0.711, Top Layer to Bottom Layer, 27 vias
v3: diameter 0.5, hole 0.5, Top Layer to Bottom Layer, 24 vias
v4: diameter 3, hole 2.54, Top Layer to Bottom Layer, 8 vias

## Nets (pads, with @x,y where several pads share a name; then routed paths per layer and width w, separated by ;. In a path a pad name is that pad's centre, name@x,y a point inside that pad or via, vN(x,y) a via of type N, cw(c..) or ccw(c..) an arc to the next point about the centre after c; other vN are vias at no path point)
AGND: C10.2 C16.2 R30.2 U3.20 U4.1 U4.2 | length 30.2
  Top Layer w0.254: C10.2@82.21,75.575 83.219,75.575 U3.20@86.994,79.35 87.75,80.106 87.75,80.625
  Top Layer w0.5: v1(82.625,89.375) 78.6,89.375 76.55,87.325 76.55,84.975 80.1,81.425 86.95,81.425 87.75,80.625
  other v1: 118.9,98.8 118.925,101.3
AIN1: JS1.8 U3.16 | length 37.1
  Top Layer w0.254: JS1.8@54.624,84.081 54.844,84.081 55.775,83.15 62.175,83.15 62.825,83.8 v1(62.825,86.525) ; v1@79.825,84.975 84.126,84.975 U3.16@85.933,83.168
  Bottom Layer w0.254: v1(62.825,86.525) 63.675,87.375 78.107,87.375 79.507,85.975 79.507,85.121 v1(79.653,84.975)
AIN2: JS2.8 U3.15 | length 59.1
  Top Layer w0.254: JS2.8@54.573,66.456 51.319,66.456 50.375,67.4 50.375,81.325 51.45,82.4 62.675,82.4 63.525,83.25 v1(63.525,85.375) ; v1@78.9,85.725 84.083,85.725 U3.15@86.286,83.522
  Bottom Layer w0.254: v1(63.525,85.375) 65.05,86.9 77.4,86.9 v1(78.575,85.725)
AVCC: C10.1 R23.2 U3.19 | length 7.8
  Top Layer w0.254: R23.2@79.9,77.125 82.16,77.125 82.21,77.175 84.112,77.175 U3.19@86.64,79.703
CMD/MLDP: U2.8 U3.27 | length 56.9
  Top Layer w0.254: v1(87.225,74.975) 87.568,74.975 U3.27@89.468,76.875 ; v1(93.975,67.65) 95.3,67.65 102.675,60.275 118.75,60.275 120.225,58.8 120.225,54 123.575,50.65 123.575,48.2 122.929,47.554 U2.8@121.962,47.554
  Bottom Layer w0.254: v1(87.225,74.975) 93.975,68.225 v1(93.975,67.65)
CTS: COM1.7 Q4.1 R14.1 | length 15.9
  Top Layer w0.254: COM1.7@79.85,40.8 79.85,45.025 82.504,47.679 Q4.1@84.008,47.679 ; Q4.1@84.024,47.694 R14.1@84.024,54.15
EN1: P2_M.1 U1_M.5 U3.62 | length 34.5
  Top Layer w0.254: U3.62@94.701,87.764 96.25,89.313 96.25,96.475 95.525,97.2 95.525,100 99.875,104.35 99.875,110.3 102.429,112.854 U1_M.5@108.056,112.854
EN2: P2_S.1 U1_S.5 U3.1 | length 21.9
  Top Layer w0.254: U1_S.5@88.834,106.922 88.834,102.909 85.825,99.9 85.825,98.75 87.95,96.625 87.95,91.758 U3.1@91.236,88.472
GND: C1_M.2 C1_S.2 C2_M.1 C2_S.1 C3.2 C4.2 C5.2 C6.2 C7.2 C8.2 C9.2 C11.2 C12.2 C13.2 C14.2 C15.2 C18.2 C19.2 C20.2 C21.2 C22.2 COM1.2 D1.2 D2.2 D3.2 D4.2 D5.2 JS1.2 JS2.2 P3.3 POWER_IN.2 Q5.2 R4.2 R30.1 R31.1 R32.1 S1.2 U1_M.4 U1_S.4 U2.1 U2.9 U2.16 U2.24 U3.9 U3.25 U3.41 U5.7 | length 54.6
  Top Layer w0.254: C15.2@71.635,113.11 C15.2@71.8,113.275 ; 87.375,86.725 87.375,86.676 U3.9@88.408,85.643 ; 87.475,76.25 87.475,76.296 U3.25@88.761,77.582 89.979,78.8 90,78.8 ; v1(87.7,109.25) 88.028,108.922 U1_S.4@88.834,108.922 ; U3.41@96.822,77.936 98.7,76.058 ; D3.2@98.442,41.266 D3.2@98.472,41.236 ; R30.1@123.75,103.225 R30.1@123.75,103.3 ; C21.2@129.9,108.475 131.75,108.475 C20.2@131.775,108.45 U5.7@134.24,108.45 ; U5.7@134.275,108.415 U5.7@134.24,108.45 ; v1(136.35,108.45) U5.7@134.24,108.45
  Top Layer w0.5: R30.1@123.75,103.3 123.75,115.425 124.825,116.5 145.425,116.5 147.484,114.441 POWER_IN.2@147.484,112.854
  other v1: 94.7,54.275 97.625,54.275 103.325,54.275 105.375,54.275 107.275,54.275 109.275,54.275 111.525,54.275 114.5,54.275 89.525,55.525 98.925,72.85 100.925,74.775 109.35,80.3 136.775,104.125 107.775,106.575 110.05,106.6 94.9,106.625 87.725,106.675 136.375,107.375 137.65,107.45 94.875,107.9 87.7,108 137.65,108.45 94.875,109.1 136.325,109.525 137.6,109.525 136.3,110.6 137.6,110.625 136.825,112 107.675,114.3 109,114.3 110.225,114.3
  other v2: 122.375,54.8 77.8,66.625 79.625,66.625 77.85,68.825 115,80.375 76.3,81.225 77.875,91.825 80.075,93.6 77.875,93.65 98.4,93.675 138.975,96.4 138.975,100.75 136.825,113.45 139.675,113.45 73.575,115.8
GNDS_M: C23_M.2 C24_M.1 JS3_M.2 U6_M.9 U6_M.12
  other v4: 51,112.5
GNDS_S: C23_S.2 C24_S.1 JS3_S.2 U6_S.9 U6_S.12
GPIO1_S_M: JS3_M.3 U6_M.4 | length 13.2
  Top Layer w0.254: JS3_M.3@52.664,117.536 52.664,114.686 53.225,114.125 53.225,109.548 52.664,108.986 52.664,106.136 52.944,105.856 U6_M.4@53.919,105.856
GPIO1_S_S: JS3_S.3 U6_S.4 | length 14.5
  Top Layer w0.254: U6_S.4@55.156,54.717 56.156,54.717 56.656,54.217 56.656,52.192 55.7,51.236 55.7,45.348 56.086,44.962 JS3_S.3@56.086,41.937
GPIO2_S_M: JS3_M.4 U6_M.1 | length 12
  Top Layer w0.254: U6_M.1@53.919,108.106 53.919,120.061 JS3_M.4@53.934,120.076
GPIO2_S_S: JS3_S.4 U6_S.1 | length 13.2
  Top Layer w0.254: JS3_S.4@54.816,39.397 54.816,42.852 55.156,43.192 U6_S.1@55.156,52.467
GPIO10: JS1.3 R16.1 U3.52 | length 59.3
  Top Layer w0.254: JS1.3@52.084,90.431 57.031,90.431 57.969,91.369 R16.1@59.439,91.369 ; U3.52@98.237,84.229 99.108,85.1 99.45,85.1 100.725,86.375 100.725,87.6 v1(100.35,87.975)
  Bottom Layer w0.254: v1(57.986,91.386) 59.948,89.425 78.5,89.425 83.15,84.775 94,84.775 94.239,85.014 97.389,85.014 v1(100.35,87.975)
GPIO11: JS1.4 R15.1 U3.53 | length 52.6
  Top Layer w0.254: JS1.4@54.624,89.161 59.436,89.161 R15.1@59.439,89.165 ; U3.53@97.883,84.582 v1(99.942,86.642)
  Bottom Layer w0.254: v1(57.992,89.178) 58.296,88.875 78.475,88.875 83,84.35 94.55,84.35 94.804,84.604 97.904,84.604 v1@99.925,86.625
GPIO20: JS2.3 R20.1 U3.54 | length 65.3
  Top Layer w0.254: JS2.3@52.033,72.806 55.756,72.806 58.042,75.092 R20.1@59.54,75.092 ; v1(96.775,83.15) 96.775,83.732 96.55,83.957 U3.54@97.529,84.936
  Bottom Layer w0.254: v1(58.192,75.117) 57.055,76.255 57.055,87.23 57.75,87.925 78.275,87.925 83.05,83.15 v1(96.775,83.15)
GPIO21: JS2.4 R19.1 U3.55 | length 64.4
  Top Layer w0.254: JS2.4@54.573,71.536 56.811,71.536 57.7,72.425 R19.1@59.54,72.425 ; v1(95.85,83.875) 95.85,83.964 U3.55@97.176,85.29 U3.55@97.165,85.29
  Bottom Layer w0.254: v1(58.142,72.417) 56.674,73.886 56.674,87.474 57.6,88.4 78.4,88.4 82.925,83.875 v1(95.85,83.875)
IMSENSE: C16.1 U3.14 U4.3 | length 55.9
  Top Layer w0.254: v1(84,88.225) 84,86.525 83.995,86.52 U3.14@86.64,83.875 ; U4.3@121.075,99.8 C16.1@123.4,99.8 ; v1(122.275,100.925) C16.1@123.4,99.8 ; C16.1@123.675,99.8 C16.1@123.4,99.8
  Bottom Layer w0.254: v1(84,88.225) 85.35,88.225 88.2,91.075 106.975,91.075 110.825,94.925 110.825,99.625 111.425,100.225 121.575,100.225 v1(122.275,100.925)
INT1: JS1.7
INT2: JS2.7